# Altium PCB BackUp_XT60_direkt_FotoKiteAdapter2.PcbDoc
Units mm, origin at the board's own origin, x right, y up, seen from the top; angles counter-clockwise.
Board outline 65.07 x 51.43 mm, 2 copper layers (Top Layer, Bottom Layer); 105 components, 57 nets, 295 pads, 32 vias.
Unrouted connection lines stored in the file: 201.
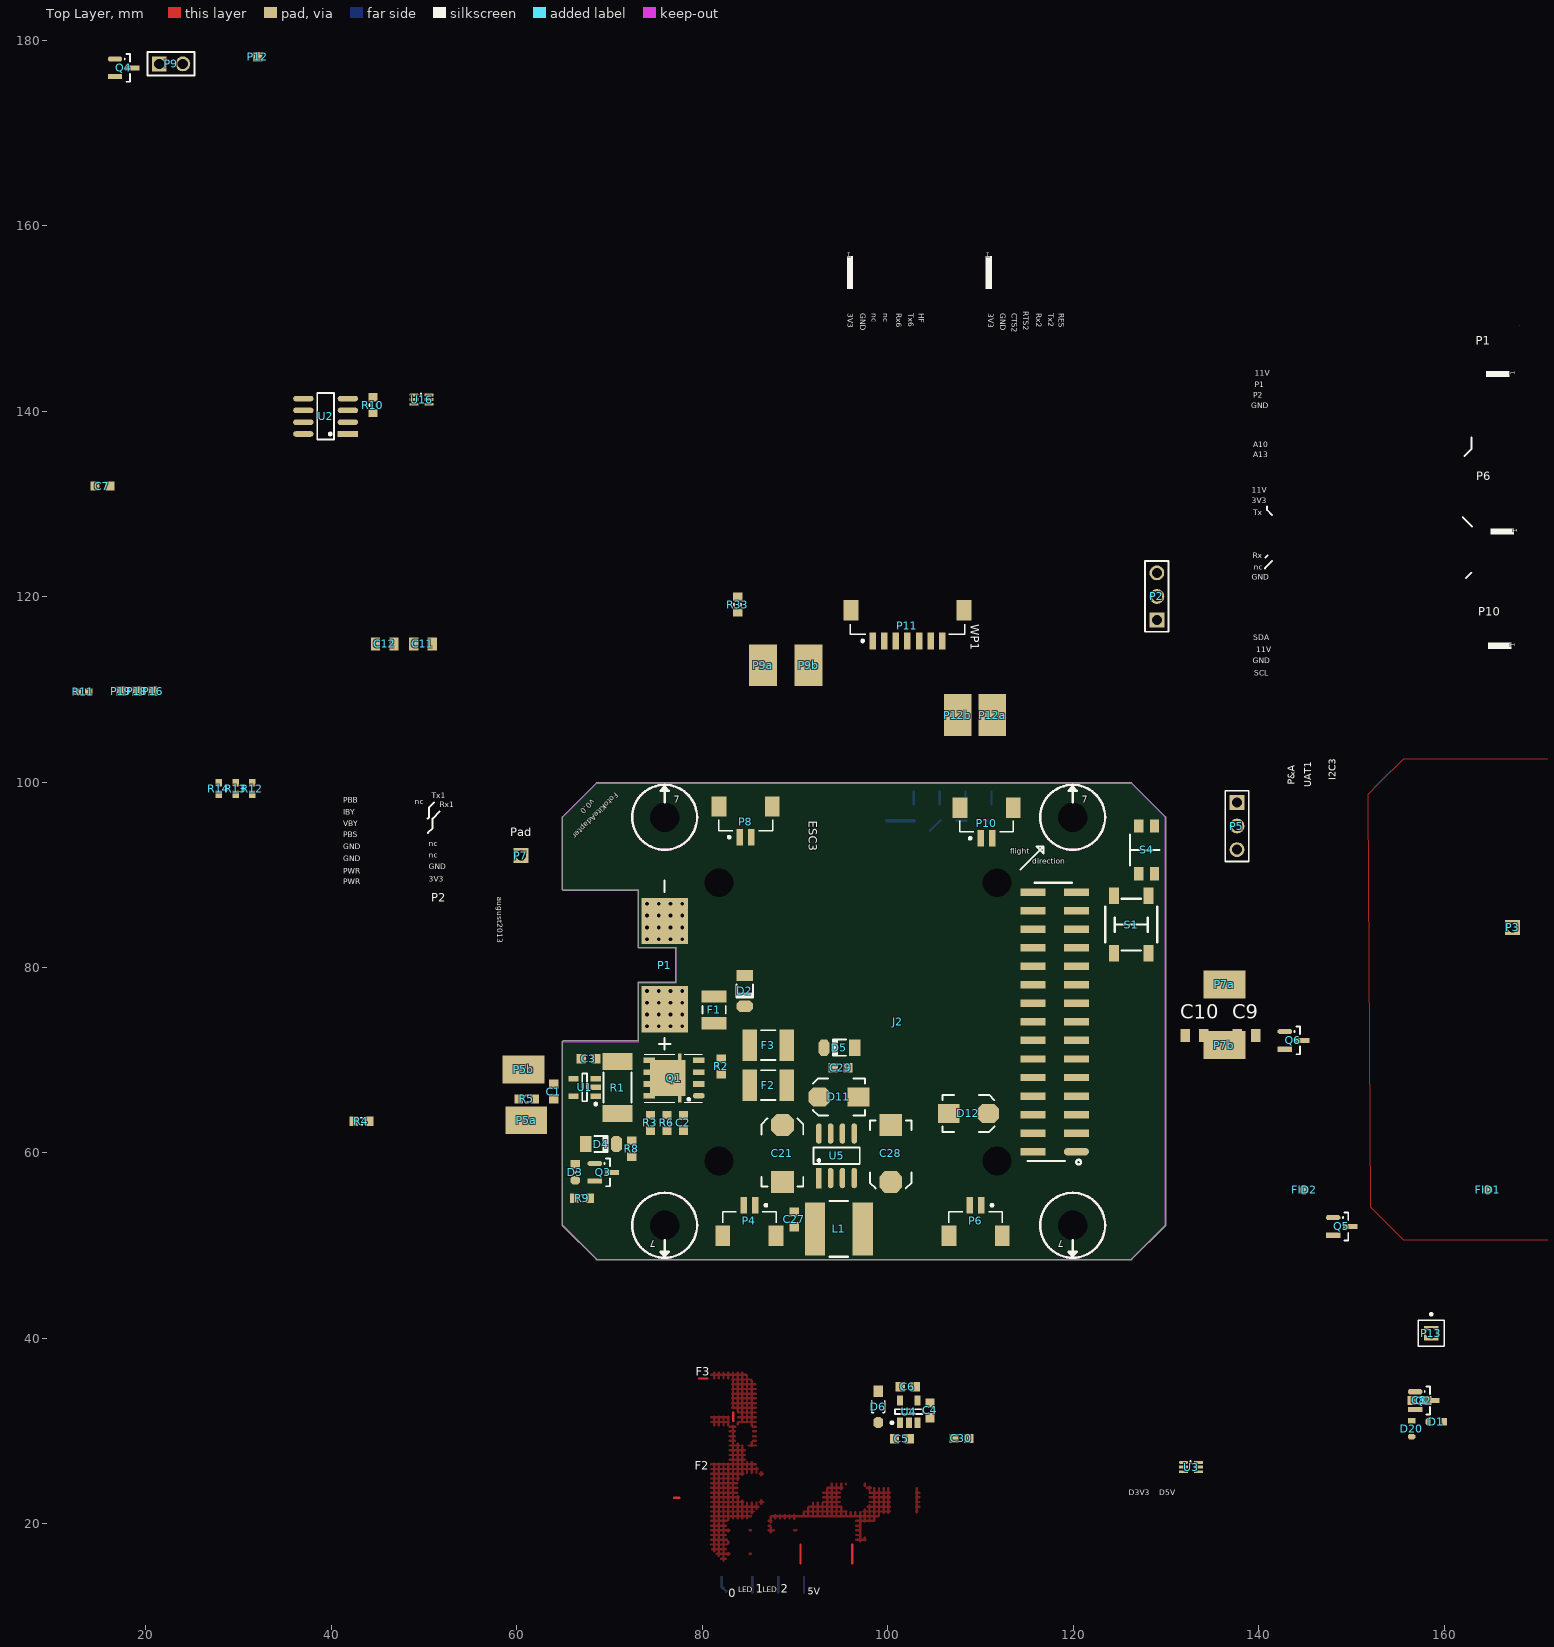
[diagram p0: Top Layer view]
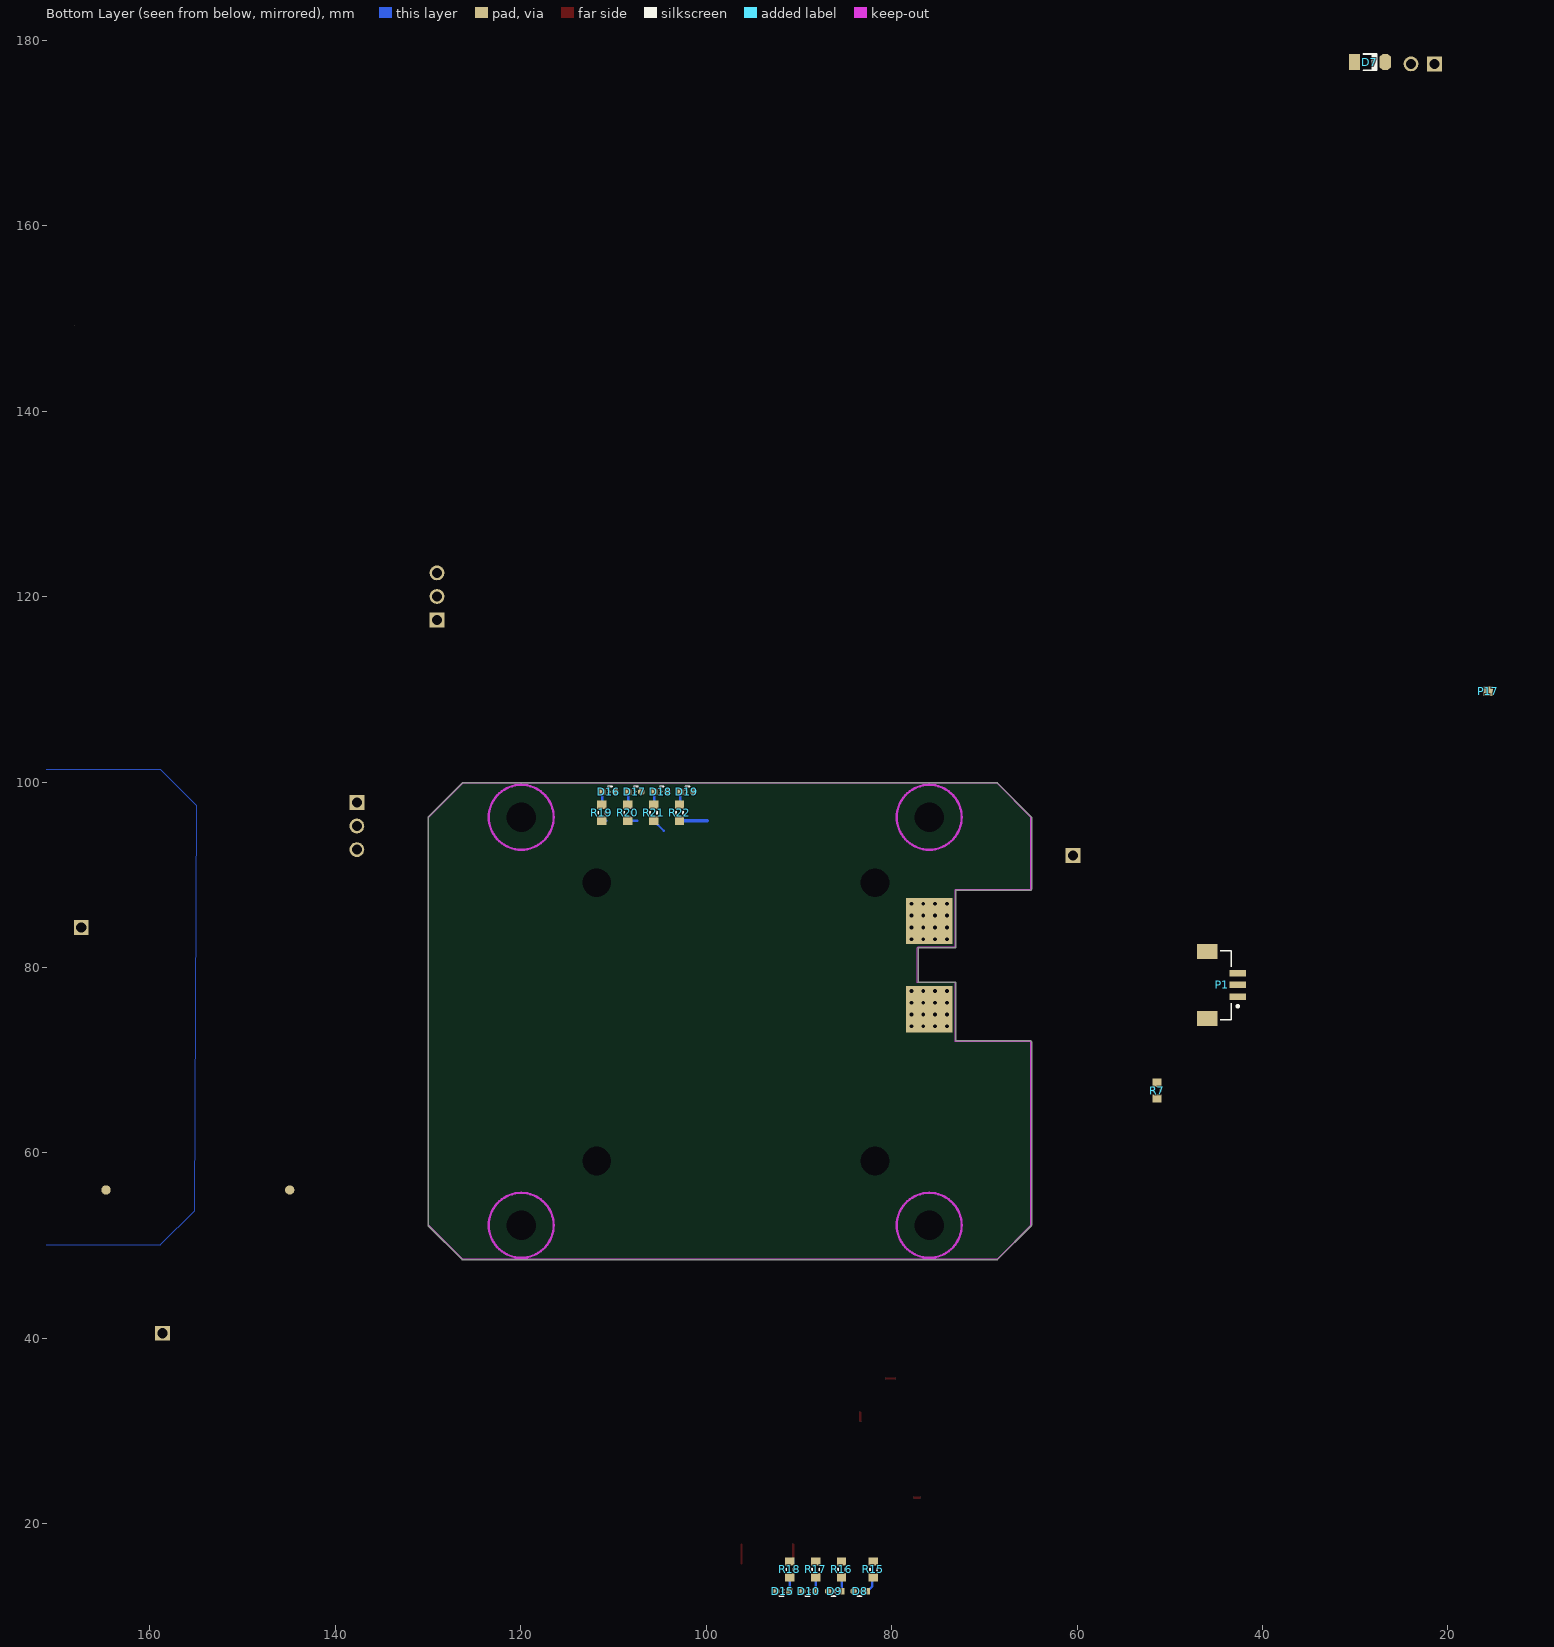
[diagram p1: Bottom Layer view, seen from below]

## Layer stack, top to bottom
Top Layer: signal copper 0.0356
Dielectric: core 0.32, FR-4, Dk 4.8
Bottom Layer: signal copper 0.0356

## Board outline
64.931,52.152 64.932,52.152 68.583,48.5 ccw(c68.629,48.545) 68.584,48.5 68.583,48.5 ccw(c68.629,48.545) 68.629,48.481 126.263,48.481 ccw(c126.263,48.545) 126.309,48.5 129.961,52.152 ccw(c129.915,52.197) 129.979,52.197 129.979,96.197 ccw(c129.915,96.197) 129.959,96.244 129.96,96.242 126.309,99.894 ccw(c126.263,99.849) 126.263,99.913 68.629,99.913 ccw(c68.629,99.849) 68.583,99.894 64.932,96.242 ccw(c64.977,96.197) 64.913,96.197 64.913,88.439 ccw(c64.977,88.439) 64.962,88.377 ccw(c65.024,88.392) 65.024,88.328 73.088,88.328 73.088,82.194 ccw(c73.152,82.194) 73.152,82.131 77.152,82.131 77.152,78.423 73.152,78.423 ccw(c73.152,78.359) 73.088,78.359 73.088,72.073 65.002,72.073 ccw(c65.002,72.009) 64.946,72.04 ccw(c64.977,71.984) 64.913,71.984 64.913,52.197 ccw(c64.977,52.197) 64.932,52.152 64.931,52.152 ccw(c64.977,52.197)

## Design rules (kind name [scope] priority, off if disabled: settings)
Clearance "fine pitch clearance" [HasFootprint('SSOP16') OR   HasFootprint('DF17(3.0)-20DS-0.5V(57)-RECEPTABLE') OR HasFootprint('SOT-666-N') OR HasFootprint('LQFP100 50P1600X1600X160-N') OR HasFootprint('SSOP-SS20_N')  OR HasFootprint('TSSOP10_L') and not InNetClass('POWER')] p1: gap=0.127
Clearance "std clearance" [All] p2: gap=0.254 // normal signals
FabricationTestPointUsage TestPointUsage [All] p1: valid=0 allowmultiple=FALSE
FabricationTestpoint Testpoint [All] p1: side=3 testpointundercomponent=TRUE minsize=1.016 maxsize=2.54 preferedsize=1.524 minholesize=0 maxholesize=1.016 preferedholesize=0.813 testpointgrid=0.025 allowsidetop=TRUE allowsidebottom=TRUE usegrid=TRUE gridtolerance=0
HoleSize [All] p1: absolutevalues=TRUE maxlimit=10 minlimit=0.3 maxpercent=80.000 minpercent=20.000
MinimumSolderMaskSliver [All] p1: minsoldermaskwidth=0.046
PolygonConnect PolygonConnect_1 [InNetClass('POWER')AND isvia] p1: connectstyle=Direct reliefconductorwidth=0.254 reliefentries=4 polygonreliefangle="90 Angle" airgapwidth=0.254
PolygonConnect PolygonConnect_3 [InNetClass('POWER')and InPadClass('POWER')] p2: connectstyle=Direct reliefconductorwidth=0.508 reliefentries=4 polygonreliefangle="90 Angle" airgapwidth=0.254
PolygonConnect PolygonConnect_2 [InNetClass('POWER') and PadXSize_AllLayers > 15] p3: connectstyle=Relief reliefconductorwidth=0.508 reliefentries=4 polygonreliefangle="90 Angle" airgapwidth=0.254
PolygonConnect [All] p4: connectstyle=Relief reliefconductorwidth=0.254 reliefentries=4 polygonreliefangle="90 Angle" airgapwidth=0.254
RoomDefinition uC [InComponentClass('uC')] p1: confinementstyle=ConfineIn formatcopy=TRUE lockcomponents=FALSE outline 0,0 50.8,0 50.8,25.4 0,25.4
RoomDefinition Power [InComponentClass('Power')] p2: confinementstyle=ConfineIn formatcopy=TRUE lockcomponents=FALSE outline 155.571,32.678 160.905,32.678 160.905,39.79 155.571,39.79
RoomDefinition Connector [InComponentClass('Connector')] p3: confinementstyle=ConfineIn formatcopy=TRUE lockcomponents=FALSE outline 155.571,26.074 165.223,26.074 165.223,31.154 155.571,31.154
RoutingTopology "power supply" [InNetClass('Power')] p1: topology=Starburst
RoutingTopology "std signal lines" [All] p2: topology=Shortest
RoutingVias [All] p1: holewidth=0.4 width=0.8 viastyle="Through Hole" minholewidth=0.4 minwidth=0.8 maxholewidth=0.4 maxwidth=0.8
SMDNeckDown finepitch [hasFootprint('TSSOP10_L')] p1: percent=120.000
SMDNeckDown [All] p2: percent=100.000
SilkToSilkClearance SilkToSilkClearance_1 [HasFootprint('3 axis racceleration')] p1: silktosilkclearance=0
SilkToSilkClearance [All] p2: silktosilkclearance=0.127
SilkToSolderMaskClearance SilkscreenOverComponentPads [IsPad] p1: minsilkscreentomaskgap=0.127 clearancetoexposedcopper=TRUE
SolderMaskExpansion [All] p1: expansion=0.102
Width "Schematic Width Constraint" [InNet('SWBATT')] p1: maxlimit=5.08 minlimit=0.254 preferedwidth=0.635 minimp=50.000000 maximp=50.000000 favimp=50.000000
Width "pwr lines" [InNetClass('Power')] p2: maxlimit=2.54 minlimit=0.203 preferedwidth=0.381
Width "signal lines Width" [All] p3: maxlimit=0.635 minlimit=0.203 preferedwidth=0.254 // std lines for low current signals
21 further rules are at their usual default settings.

## Classes and differential pairs
polygon class "New Class": gnd
component class Connector: C7 C11 C12 FID1 FID2 P4 P5a P5b P6 P7a P7b P8 P9a P9b P10 P11 P12a P12b P16 P17 P18 P19 Q5 Q6 R10 R11 R12 R13 R14 U2 U3 U16
component class Power: C1 C2 C3 C4 C5 C6 C21 C27 C28 C29 C30 D1 D2 D3 D4 D5 D6 D11 D20 F1 F2 F3 L1 P13 Q1 Q2 Q3 R1 R2 R3 R4 R5 R6 R7 R8 R9 S1 U1 U4 U5
net class Power: BAT D5V D11V2 DGND NetC27_1 NetD12_2 SWBATT V_BATT_SUPPLY V_SUPPLY
component class uC: C8 D7 D8 D9 D10 D12 D15 D16 D17 D18 D19 J2 P2 P3 P5 P7 P9 P12 Q4 R15 R16 R17 R18 R19 R20 R21 R22 R33 S4
pad class POWER: C21-1 C21-2 C28-1 C29-2 C30-2 D5-2 D12-1 F1-1 F1-2 F2-1 F2-2 L1-2 P2-1 P2-2 U5-4 U5-7

## Components (designator, comment, footprint, x,y, rotation, side; value= is the part's Value field where it differs from the comment)
C1 "100nF" "CAP_0603i_1608m -N" 63.984,66.624 r270 top
C2 "100nF" "CAP_0603i_1608m -N" 77.978,63.246 r90 top
C3 "100nF" "CAP_0603i_1608m -N" 67.742,70.157 r0 top
C4 "10nF" "CAP_0603i_1608m -N" 104.572,32.233 r90 top
C5 "2u2F" "CAP_0603i_1608m -N" 101.524,29.185 r180 top
C6 "2u2F" "CAP_0603i_1608m -N" 102.159,34.773 r180 top
C7 "100nF / 6V" "CAP_0603i_1608m -N" 15.316,131.922 r0 top
C8 "100nF" "CAP_0603i_1608m -N" 157.349,33.313 r0 top
C9 "10uF" "CAP_0805i_2012m -N" 138.684,72.644 r0 top
C10 "10uF" "CAP_0805i_2012m -N" 133.096,72.644 r0 top
C11 "10uF" "CAP_0805i_2012m -N" 49.878,114.897 r0 top
C12 "10uF" "CAP_0805i_2012m -N" 45.77,114.897 r0 top
C21 "100uF" "EIA-7343-31 case D -N" 88.646,59.944 r270 top
C27 "10nF" "CAP_0603i_1608m -N" 89.916,52.832 r90 top
C28 "100uF" "EIA-7343-31 case D -N" 100.33,59.944 r90 top
C29 "100nF" "CAP_0603i_1608m -N" 94.92,69.19 r180 top
C30 "100nF" "CAP_0603i_1608m -N" 107.95,29.21 r180 top
D1 "CDSU4148" SOD523F 159.15,31.012 r0 top
D2 "SMA6J20A" "Mini MELF - SOD-80 -N" 84.582,77.47 r90 top
D3 "Power" LED_0603i_1608m-n 66.294,57.912 r90 top
D4 "5V6" "Mini MELF - SOD-80 -N" 69.088,60.96 r180 top
D5 "SMA6J20A" "Mini MELF - SOD-80 -N" 94.793,71.349 r0 top
D6 "MBR0540T1G" SOD123 98.984,32.614 r90 top
D7 "Diode" "Mini MELF - SOD-80 -N" 28.417,177.641 r0 bottom
D8 "Diode LED green" LED_LTST_SIDE 83.363,12.74 r180 bottom (schematic designator D1)
D9 "Diode LED red" LED_LTST_SIDE 86.157,12.74 r180 bottom (schematic designator D2)
D10 "Diode LED yellow" LED_LTST_SIDE 88.951,12.74 r180 bottom (schematic designator D3)
D11 "B230" "Diode SMB DO-214aa -N" 94.742,66.04 r0 top
D12 "B230" "Diode SMB DO-214aa -N" 108.712,64.262 r180 top
D15 "Diode LED green" LED_LTST_SIDE 91.745,12.74 r180 bottom (schematic designator D4)
D16 "Diode LED green" LED_LTST_SIDE 110.49,98.972 r0 bottom (schematic designator D7)
D17 "Diode LED red" LED_LTST_SIDE 107.696,98.972 r0 bottom (schematic designator D8)
D18 "Diode LED yellow" LED_LTST_SIDE 104.902,98.972 r0 bottom (schematic designator D9)
D19 "Diode LED green" LED_LTST_SIDE 102.108,98.972 r0 bottom (schematic designator D10)
D20 "CDSU4148" SOD523F 156.51,30.25 r90 top
F1 "3413.0331.22" "Fuse_1210i_3225m -N" 81.28,75.438 r270 top (schematic designator F7)
F2 "1812L150/24MR" "Fuse_1812i_4532m -N" 87.122,67.31 r0 top (schematic designator F1)
F3 "1812L150/24MR" "Fuse_1812i_4532m -N" 87.122,71.628 r0 top (schematic designator F2)
FID1 "Fiducial" "Fiducial 2 sides" 164.719,56.007 r90 top
FID2 "Fiducial" "Fiducial 2 sides" 144.907,56.007 r90 top
J2 "PX4FMU_v1.7_Expansion Con" PX4FMU_v1.7_module_sicket 122.301,56.134 r180 top locked
L1 "ASPI-6045S-470M-T" ABRACON_ASPI-6045S 94.742,51.816 r0 top
P1 "XT60" XT60 75.946,80.264 r90 top
P1 "DF13-3Pin" Hirose_DF13_SMT_RA_N3 45.974,78.74 r90 bottom
P2 "Header 3" HDR1X3 129.032,117.475 r90 top
P3 "Pad" "PIN1 style 2" 167.386,84.328 r270 top
P4 "ESC1" Hirose_DF13_SMT_RA_N2 85.09,51.054 r180 top
P5 "Header 3" HDR1X3 137.668,97.79 r270 top
P5a "Motor 1+" Pad_3x4.5mm 61.011,63.525 r90 top
P5b "Motor 1-" Pad_3x4.5mm 60.731,69.012 r90 top
P6 "ESC2" Hirose_DF13_SMT_RA_N2 109.474,51.054 r180 top
P7 "Pad" "PIN1 style 2" 60.452,92.075 r90 top
P7a "Motor 2+" Pad_3x4.5mm 136.322,78.181 r90 top
P7b "Motor 2-" Pad_3x4.5mm 136.322,71.628 r90 top
P8 "ESC3" Hirose_DF13_SMT_RA_N2 84.684,97.358 r0 top
P9 "Buzzer" HDR1X2 21.449,177.446 r0 top
P9a "Motor 3+" Pad_3x4.5mm 86.538,112.598 r0 top
P9b "Motor 3-" Pad_3x4.5mm 91.465,112.598 r0 top
P10 "ESC4" Hirose_DF13_SMT_RA_N2 110.668,97.231 r0 top
P11 "WP1" Hirose_DF13_SMT_RA_N7 102.133,118.516 r0 top
P12 "Pad" Pad_0603 32.077,178.214 r90 top
P12a "Motor 4+" Pad_3x4.5mm 111.27,107.224 r0 top
P12b "Motor 4-" Pad_3x4.5mm 107.559,107.224 r0 top
P13 "GND" PIN1 158.619,40.552 r0 top
P16 "I2C GND" Pad_0603 20.781,109.784 r90 top
P17 "I2C GND" Pad_0603 15.648,109.784 r270 bottom
P18 "I2C GND" Pad_0603 19.07,109.784 r90 top
P19 "I2C GND" Pad_0603 17.359,109.784 r90 top
Q1 "SI7635DP-T1-GE3" "PowerPak SO-8" 76.962,68.072 r180 top
Q2 "BSS138" SOT23-N 157.8,33.299 r0 top
Q3 "BC817-40" SOT23-N 69.342,57.912 r0 top
Q4 "BSS138" SOT23-N 17.596,177.016 r0 top
Q5 "BSN20" SOT23-N 148.971,52.07 r0 top
Q6 "BSN20" SOT23-N 143.764,72.136 r0 top
R1 "1m" "RES_2512i_6332m -N" 70.866,67.056 r270 top
R2 "100k" "RES_0603i_1608m -N" 82.042,69.342 r270 top
R3 "360k" "RES_0603i_1608m -N" 74.422,63.246 r270 top
R4 "100" "RES_0603i_1608m -N" 43.256,63.418 r0 top
R5 "100k" "RES_0603i_1608m -N" 61.076,65.824 r180 top
R6 "100k" "RES_0603i_1608m -N" 76.2,63.246 r90 top
R7 "10k" "RES_0603i_1608m -N" 51.372,66.726 r270 bottom
R8 "10k" "RES_0603i_1608m -N" 72.39,60.452 r270 top
R9 "2k2" "RES_0603i_1608m -N" 67.056,55.118 r180 top
R10 "120" "RES_0603i_1608m -N" 44.495,140.64 r90 top
R11 "Res" "RES_0402i_1005m -N" 13.238,109.736 r0 top
R12 "Res" "RES_0402i_1005m -N" 31.479,99.3 r90 top
R13 "Res" "RES_0402i_1005m -N" 29.671,99.3 r90 top
R14 "Res" "RES_0402i_1005m -N" 27.863,99.3 r90 top
R15 "2k7" "RES_0603i_1608m -N" 81.966,15.088 r90 bottom (schematic designator R2)
R16 "1k2" "RES_0603i_1608m -N" 85.395,15.088 r90 bottom (schematic designator R3)
R17 "680R" "RES_0603i_1608m -N" 88.189,15.088 r90 bottom (schematic designator R4)
R18 "1k" "RES_0603i_1608m -N" 90.983,15.088 r90 bottom (schematic designator R5)
R19 "2k7" "RES_0603i_1608m -N" 111.252,96.686 r270 bottom (schematic designator R6)
R20 "1k2" "RES_0603i_1608m -N" 108.458,96.686 r270 bottom (schematic designator R7)
R21 "680R" "RES_0603i_1608m -N" 105.664,96.686 r270 bottom (schematic designator R8)
R22 "1k" "RES_0603i_1608m -N" 102.87,96.686 r270 bottom (schematic designator R9)
R33 "10k" "RES_0603i_1608m -N" 83.82,119.126 r90 top
S1 "SW PB" SW-KPT-1187B 126.263,84.633 r90 top
S4 "EVQ-PUB02K" EVQPU 127.914,92.685 r90 top
U1 "MAX4372FEUK+T" MAXM-U5+1_N 67.317,67.074 r180 top
U2 "CAN Transceiver" SOIC127P600-8N 39.387,139.44 r180 top (schematic designator U?)
U3 "PESD3V3L5UV" SOT-666-N 132.72,26.127 r0 top
U4 "LP2985IM5X-3.3" MF05A_N 102.286,32.106 r90 top
U5 "LM2675MX-5.0/NOPB" SOIC127P600-8N 94.488,59.69 r90 top
U16 "PESD3V3L5UV" SOT-666-N 49.727,141.25 r0 top

## Footprints (in the part's own frame and the unit in brackets; to place one, negate y for a bottom-side part, rotate by r counter-clockwise, add the part's x,y. Pads: shape width x height; smd on the part's side, far side on the other; paste and mask are expansions set on the pad)
ABRACON_ASPI-6045S [mm]
  rect 2.2x5.7 smd: 1(-2.58,0) 2(2.58,0)
  silkscreen extent -1,-3.05 1,3, body extent -2.96,-3.05 3,3, height 4.5
"CAP_0603i_1608m -N" [mm] "Chip Capacitor, Body 1.6x0.8mm, IPC Medium Density"
  rect 1x1 smd: 1(-0.8,0) 2(0.8,0)
  body extent -0.8,-0.4 0.8,0.4, height 0.8
"CAP_0805i_2012m -N" [mm] "Chip Capacitor, Body 2.0x1.3mm, IPC Medium Density"
  rect 1x1.4 smd: 1(-1,0) 2(1,0)
  body extent -1,-0.62 1,0.63, height 0.6
"Diode SMB DO-214aa -N" [mm] "Diode Case  4.4x3.5mm, IPC Medium Density"
  rect 2.35x2.05 smd: 1(2.125,0)
  oct 2.35x2.05 smd: 2(-2.125,0)
  silkscreen extent -2.8,-2 2.8,2, body extent -2.7,-1.8 2.7,1.8, height 2.5
"EIA-7343-31 case D -N" [mm] "Molded Diode, 2-Leads, Body 7.3x4.3mm, IPC Medium Density"
  oct 2.35x2.45 smd: 1(-3.075,0)
  rect 2.35x2.45 smd: 2(3.075,0)
  silkscreen extent -3.77,-2.25 3.56,2.25, body extent -4.5,-2.32 4.5,2.29
EVQPU [mm] "Panasonic SMT Tact Switch"
  rect 1.45x1 smd: 1(-2.575,0.85) 1(2.575,0.85) 2(-2.575,-0.85) 2(2.575,-0.85)
  silkscreen extent -1.65,-1.4 1.65,1.78, body extent -2.35,-2.66 2.35,1.71, height 1.65
"Fiducial 2 sides" [mm] "Fiducial marks"
  round 1 smd mask+0.5: 0(0,0)
  round 1 smd far side mask+0.5: 0(0,0)
"Fuse_1210i_3225m -N" [mm] "Chip Fuse Body 3.2x2.5mm, IPC Medium Density"
  rect 1.3x2.7 smd: 1(-1.45,0) 2(1.45,0)
  silkscreen extent -0.4,-1.25 0.4,1.25, body extent -1.61,-1.29 1.61,1.29, height 0.67
"Fuse_1812i_4532m -N" [mm] "Chip Fuse Body 4.5x3.2mm, IPC Medium Density"
  rect 1.6x3.4 smd: 1(-2,0) 2(2,0)
  silkscreen extent -0.8,-1.6 0.8,1.6, body extent -2.36,-1.7 2.37,1.71, height 1.34
HDR1X2 [mm] "Connector; Header; 2 Position"
  rect 1.6x1.6 hole 1.1: 1(0,0)
  round 1.6 hole 1.1: 2(2.54,0)
  silkscreen extent -1.27,-1.27 3.81,1.27, body extent -1.27,-1.27 3.81,1.27, height 10.3
HDR1X3 [mm] "Connector; Header; 3 Position"
  rect 1.6x1.6 hole 1.1: 1(0,0)
  round 1.6 hole 1.1: 2(2.54,0) 3(5.08,0)
  silkscreen extent -1.27,-1.27 6.35,1.27, body extent -1.27,-1.27 6.35,1.27, height 1
Hirose_DF13_SMT_RA_N2 [mm] "Hirose DF13-series SMT right-angle connector, 2 pin"
  rect 0.7x1.8 smd: 1(-0.625,-3.3) 2(0.625,-3.3)
  rect 1.6x2.2 smd: ""(-2.875,0) ""(2.875,0)
  silkscreen extent -2.9,-3.43 2.9,-1.4, body extent -2.08,-2.4 2.07,2.5, height 3.6
Hirose_DF13_SMT_RA_N3 [mm] "Hirose DF13-series SMT right-angle connector, 3 pin"
  rect 0.7x1.8 smd: 1(-1.875,-3.3) 2(-0.625,-3.3) 3(0.625,-3.3)
  rect 1.6x2.2 smd: ""(-4.225,0) ""(2.975,0)
  silkscreen extent -4.4,-3.43 3.05,-1.4, body extent -4.38,-2.6 3,2.3, height 3.6
Hirose_DF13_SMT_RA_N7 [mm] "Hirose DF13-series SMT right-angle connector, 7 pin"
  rect 0.7x1.8 smd: 1(-3.75,-3.3) 2(-2.5,-3.3) 3(-1.25,-3.3) 4(0,-3.3) 5(1.25,-3.3) 6(2.5,-3.3) 7(3.75,-3.3)
  rect 1.6x2.2 smd: ""(-6.1,0) ""(6.1,0)
  silkscreen extent -6.17,-3.43 6.18,-1.5, body extent -6.66,-3.91 6.74,2.59, height 3.58
LED_0603i_1608m-n [mm] "Chip LED, 2-Leads, Body 1.6x0.8mm, IPC Medium Density"
  rect 0.9x1 smd: 1(0.85,0)
  oct 0.9x1 smd: 2(-0.85,0)
  silkscreen extent -0.08,-0.18 0.1,0.18, body extent -0.83,-0.34 0.83,0.38, height 0.68
LED_LTST_SIDE [mm]
  rect 0.7x0.7 smd: 1(0.7,0)
  oct 0.7x0.7 smd: 2(-0.7,0)
  silkscreen extent -0.33,-0.53 0.1,0.18, body extent -0.74,-0.81 0.85,0.34, height 0.6
MAXM-U5+1_N [mm] "SOT23, 5-Leads, Body 2.9x1.625mm, Pitch 0.95mm, IPC Medium Density"
  rect 1.1x0.6 smd: 1(-1.2,0.95) 2(-1.2,0) 3(-1.2,-0.95) 4(1.2,-0.95) 5(1.2,0.95)
  silkscreen extent -1.33,-1.5 0.25,1.92, body extent -0.87,-1.5 0.87,1.5, height 1.45
MF05A_N [mm] "SOT23, 5-Leads, Body 2.9x1.6mm, Pitch 0.95mm, Lead Span 2.8mm, IPC Medium Density"
  rect 1.1x0.65 smd: 1(-1.2,0.95) 2(-1.2,0) 3(-1.2,-0.95) 4(1.2,-0.95) 5(1.2,0.95)
  silkscreen extent -1.32,-1.5 0.25,1.95, body extent -0.83,-1.49 0.83,1.5, height 1.19
"Mini MELF - SOD-80 -N" [mm] "MELF Diode, 2-Leads, Body 3.5x1.5mm, IPC Medium Density"
  rect 1.2x1.75 smd: 1(1.65,0)
  oct 1.2x1.75 smd: 2(-1.65,0)
  silkscreen extent -0.7,-0.88 0.7,0.87, body extent -1.75,-0.75 1.75,0.75, height 1.55
Pad_3x4.5mm [mm]
  rect 3x4.5 smd: 1(0,0)
Pad_0603 [mm]
  rect 1x1 smd: 1(0,0)
PIN1 [mm] "Connector; Plug"
  rect 1.6x1.6 hole 1.1: 1(0,0)
  silkscreen extent -1.4,-1.4 1.4,2.17
"PIN1 style 2" [mm] "Connector; Plug"
  rect 1.6x1.6 hole 1.1: 1(0,0)
"PowerPak SO-8" [mm] "for    SI7635DP-T1-GE3"
  rect 0.4x5.3 smd: 0(-0.61,0)
  rect 3.81x3.91 smd: 0(0.69,0)
  oval 1.27x0.6 smd: 1(-2.67,1.905)
  rect 1.27x0.6 smd: 2(-2.67,0.635) 3(-2.67,-0.635) 4(-2.67,-1.905) 5(2.67,-1.905) 6(2.67,-0.635) 7(2.67,0.635) 8(2.67,1.905)
  silkscreen extent -3.02,-2.59 3.23,2.59, body extent -3.02,-2.6 3.22,2.65, height 1.19
PX4FMU_v1.7_module_sicket [mm] "socket to plug the PX4FMU into"
  round 1.524 hole 3.1: 0(10.5,-3) 0(10.5,-33) 0(40.5,-3) 0(40.5,-33)
  oval 2.7x0.8 smd: 1(1.95,-4)
  rect 2.7x0.8 smd: 2(6.65,-4) 3(1.95,-6) 4(6.65,-6) 5(1.95,-8) 6(6.65,-8) 7(1.95,-10) 8(6.65,-10) 9(1.95,-12) 10(6.65,-12) 11(1.95,-14) 12(6.65,-14) 13(1.95,-16) 14(6.65,-16) 15(1.95,-18) 16(6.65,-18) 17(1.95,-20) 18(6.65,-20) 19(1.95,-22) 20(6.65,-22) 21(1.95,-24) 22(6.65,-24) 23(1.95,-26) 24(6.65,-26) 25(1.95,-28) 26(6.65,-28) 27(1.95,-30) 28(6.65,-30) 29(1.95,-32) 30(6.65,-32)
  silkscreen extent 1.45,-33 7.2,-2.62, body extent 1.3,-33.01 7.3,-3.01, height 6.6
"RES_0402i_1005m -N" [mm] "Chip Resistor, Body 1.1x0.5mm, IPC Medium Density"
  rect 0.8x0.7 smd: 1(-0.6,0) 2(0.6,0)
  body extent -0.5,-0.25 0.5,0.25, height 0.3
"RES_0603i_1608m -N" [mm] "Chip Resistor, Body 1.6x0.8mm, IPC Medium Density"
  rect 0.9x1 smd: 1(-0.85,0) 2(0.85,0)
  silkscreen extent -0.13,-0.38 0.13,0.38, body extent -0.8,-0.4 0.8,0.4, height 0.4
"RES_2512i_6332m -N" [mm] "Chip Resistor, Body 6.3x3.2mm, IPC Medium Density"
  rect 1.8x3.2 smd: 1(-2.8,0) 2(2.8,0)
  silkscreen extent -1.6,-1.5 1.6,1.5, body extent -3.3,-1.4 3.3,1.27, height 0.71
SOD123 [mm] "SOD123  2-Leads, Body, IPC Medium Density"
  rect 1.22x1 smd: 1(1.681,0)
  oct 1.22x1 smd: 2(-1.681,0)
  silkscreen extent -0.64,-0.7 0.64,0.7, body extent -1.85,-0.84 1.85,0.76, height 1.27
SOD523F [mm] "SOD523F  2-Leads, Body, IPC Medium Density"
  rect 0.6x0.8 smd: 1(0.85,0)
  oct 0.6x0.8 smd: 2(-0.85,0)
  body extent -0.9,-0.51 0.9,0.49, height 0.85
SOIC127P600-8N [mm] "SOIC, 8-Leads, Body 4.9x3.9mm, Pitch 1.27mm, IPC Medium Density"
  rect 2.2x0.6 smd: 1(-2.4,1.905)
  oval 2.2x0.6 smd: 2(-2.4,0.635) 3(-2.4,-0.635) 4(-2.4,-1.905) 5(2.4,-1.905) 6(2.4,-0.635) 7(2.4,0.635) 8(2.4,1.905)
  silkscreen extent -0.9,-2.5 0.9,2.5, body extent -3.01,-2.5 3.01,2.5, height 1.75
SOT23-N [mm] "SOT23, 3-Leads, Body 3.0x2.6mm (max), Pitch 0.95mm, IPC Medium Density"
  oct 1.55x0.55 smd: 1(-0.925,0.95)
  rect 1.55x0.55 smd: 2(-0.925,-0.95) 3(0.925,0)
  silkscreen extent 0.13,-1.5 0.7,1.5, body extent -1.21,-1.45 1.21,1.45, height 0.98
SOT-666-N [mm] "SOT666, 6-Leads, Body 1.5x2.6mm (max), Pitch 0.50mm, IPC Medium Density"
  oct 0.99x0.3 smd: 1(-0.805,0.5)
  rect 0.99x0.3 smd: 2(-0.805,0) 3(-0.805,-0.5) 4(0.805,-0.5) 5(0.805,0) 6(0.805,0.5)
  silkscreen extent -0.05,0.38 -0.05,0.64, body extent -0.88,-0.85 0.82,0.85, height 0.6
SW-KPT-1187B [mm] "SMT Tact Switch"
  rect 1.8x1.1 smd: 1(-3.1,1.85) 1(3.1,1.85) 2(-3.1,-1.85) 2(3.1,-1.85)
  silkscreen extent -2.79,-2.79 2.79,2.79, body extent -2.6,-2.6 2.6,2.6, height 1.6
XT60 [mm] "High Power Connector"
  rect 5x5 smd: 1(-4.75,0) 2(4.75,0)
  rect 5x5 smd far side: 1(-4.75,0) 2(4.75,0)
  silkscreen extent -9.14,-0.64 9.14,0.63, body extent -7.82,-0.51 8.08,20.69, height 4.08

## Part data
C1 C2 C3 C4 C5 C6 C7 C8 C9 C10 C11 C12 C27 C29 C30: library part Cap, "capacitor"
C21 C28: library part "Cap pol", "Polarised capacitor (e.g. Electrolytic )"
D1 D20: library part Diode, "Default Diode"
D2 D4 D5: library part "Diode Zener", "Zener Diode"
D3 D8 D9 D10 D15 D16 D17 D18 D19: library part "Diode LED", "LED"
D6 D11 D12: library part "Diode  Schottky", "Schottky Diode"
D7: "Default Diode"
F1 F2 F3: library part Fuse, "Fuse"
FID1 FID2: "Fiducial mark for automatic pcb population"
J2: library part "PX4FMU_v1.7_Expansion Con_1", "J2 / J3"
L1: library part Inductor, "Inductor"
P1: "Header, 2-Pin, Power plug"
P1: "Hirose_DF13_SMT_RA_N4"
P2 P5: "Header, 3-Pin"
P3 P7 P12: "Single Pad or Testpoint"
P4 P6 P8 P10: library part DF13-2Pin, "Hirose_DF13_SMT_RA_N2"
P5a P5b P7a P7b P9a P9b P12a P12b P13 P16 P17 P18 P19: library part Pad, "Single Pad or Testpoint"
P9: library part "Header 2", "Header, 2-Pin"
P11: library part DF13-7Pin, "Hirose_DF13_SMT_RA_N8"
Q1: library part MOSFET-P-Power_2, "Power P-Channel MOSFET + pad"
Q2 Q4: library part MOSFET-N2, "N-Channel MOSFET"
Q3: library part "BJT NPN", "NPN Bipolar Transistor"
Q5 Q6: library part MOSFET-N, "N-Channel MOSFET"
R1 R2 R3 R4 R5 R6 R7 R8 R9 R10 R15 R16 R17 R18 R19 R20 R21 R22 R33: library part Res, "Resistor"
R11 R12 R13 R14: "Resistor"
S1: "Switch"
S4: library part "SW PB", "Switch"
U1: library part CMP-0252-00304-1, "Micropower, Voltage-Output, High-Side, Current-Sense Amplifier, 50 V / V Gain, -40 to 85 degC, 5-Pin SOT23 (U5+1), Pb-Free, Tape and Reel"
U2: library part "SN65 HVD 1050DR", "SN65 HVD 1050DR"
U3 U16: library part PESDx, "ESD-protection diode array, 5ch"
U4: library part CMP-0062-01952-2, "Micropower 150 mA Low-Noise Ultra Low-Dropout Regulator, 5-pin SOT-23"
U5: library part LM2675, "IC REG SIMPLE SWITCHER 8-SOIC"

## Free pads (board coordinates)
  rect 0.3x0.8 hole 3.2: 4(75.946,96.197) 5(119.946,96.197) 6(119.946,52.197) 7(75.946,52.197)

## Via types
v1: diameter 0.813, hole 0.406, Top Layer to Bottom Layer, tented both sides, 32 vias

## Nets (pads, with @x,y where several pads share a name; then routed paths per layer and width w, separated by ;. In a path a pad name is that pad's centre, name@x,y a point inside that pad or via, vN(x,y) a via of type N, cw(c..) or ccw(c..) an arc to the next point about the centre after c; other vN are vias at no path point)
5V: C7.1 U2.3
ADC_IN10: J2.11 P3.1
BAT: F1.1 P1.1@75.946,75.514
CAN_RX: J2.6 U2.4
CAN_TX: J2.5 U2.1
CANH: R10.2 U2.7 U3.6
CANL: R10.1 U2.6 U3.4
D3V3: C6.2 D6.1 P11.1 Q5.1 Q6.1 R13.2 R14.2 R33.2 U4.5
D5V: C5.2 C28.1 C30.2 D6.2 D7.2 D12.1 L1.2 P9.1 R11.2 R12.2 R18.2 R22.2 U4.1 U4.3 U5.4 | length 3
  Bottom Layer w0.381: 99.897,95.836 R22.2
D11V2: F3.2
DGND: C1.1 C2.1 C3.1 C4.1 C5.1 C6.1 C7.2 C8.1 C9.1 C10.1 C11.1 C12.1 C21.2 C28.2 C29.1 C30.1 D2.1 D4.1 D5.1 D8.2 D9.2 D10.2 D11.1 D15.2 D16.2 D17.2 D18.2 D19.2 J2.3 J2.4 J2.27 P1.2@75.946,85.014 P2.3 P5.3 P5b.1 P7b.1 P9b.1 P11.2 P12b.1 P13.1 P16.1 P17.1 P18.1 P19.1 Q2.2 Q4.2 R6.1 R7.1 R9.2 S1.1 S4.2 U1.1 U2.2 U2.8 U3.2 U4.2 U5.6 U16.2
  other v1: 74.041,73.664 75.311,73.664 76.581,73.664 77.851,73.664 74.041,74.934 75.311,74.934 76.581,74.934 77.851,74.934 74.041,76.204 75.311,76.204 76.581,76.204 77.851,76.204 74.041,77.474 75.311,77.474 76.581,77.474 77.851,77.474 74.041,83.054 75.311,83.054 76.581,83.054 77.851,83.054 74.041,84.324 75.311,84.324 76.581,84.324 77.851,84.324 74.041,85.594 75.311,85.594 76.581,85.594 77.851,85.594 74.041,86.864 75.311,86.864 76.581,86.864 77.851,86.864
GPIO: J2.30 P11.7 U16.4
I2C2_SCL: J2.17 P5.1
I2C2_SDA: J2.18 P5.2
I2C3_SCL: J2.9 Q5.2 R13.1
I2C3_SCL_5V: P4.1 P6.1 P8.1 P10.1 Q5.3 R11.1
I2C3_SDA: J2.10 Q6.2 R14.1
I2C3_SDA_5V: P4.2 P6.2 P8.2 P10.2 Q6.3 R12.1
I_BAT: C1.2 J2.29 R5.2
LED0: J2.16 R15.2 R19.2 | length 0.5
  Bottom Layer w0.254: 110.744,95.836 R19.2
LED1: J2.15 R16.2 R20.2 | length 1
  Bottom Layer w0.254: 107.442,95.836 R20.2
LED2: J2.14 R17.2 R21.2 | length 1.5
  Bottom Layer w0.254: 104.57,94.742 R21.2
NetC4_2: C4.2 U4.4
NetC27_1: C27.1 D11.2 L1.1 U5.8
NetC27_2: C27.2 U5.1
NetD1_1: D1.1 R4.1
NetD1_2: D1.2 D20.2 S1.2
NetD2_2: D2.2 F1.2 Q1.1 Q1.2 Q1.3 R2.2
NetD3_2: D3.2 Q3.3
NetD4_2: D4.2 Q3.1 R8.2
NetD7_1: D7.1 P9.2 Q4.3
NetD8_1: D8.1 R15.1 | length 1.7
  Bottom Layer w0.254: R15.1@82.093,14.238 82.093,13.248 D8.1@82.601,12.74
NetD9_1: D9.1 R16.1 | length 1.6
  Bottom Layer w0.254: D9.1@85.395,12.61 R16.1
NetD10_1: D10.1 R17.1 | length 1.6
  Bottom Layer w0.254: D10.1@88.189,12.61 R17.1
NetD12_2: D12.2 J2.1 J2.2
NetD15_1: D15.1 R18.1 | length 1.6
  Bottom Layer w0.254: D15.1@90.983,12.61 R18.1
NetD16_1: D16.1 R19.1 | length 1.4
  Bottom Layer w0.254: R19.1@111.19,97.598 D16.1
NetD17_1: D17.1 R20.1 | length 1.4
  Bottom Layer w0.254: R20.1@108.396,97.598 D17.1
NetD18_1: D18.1 R21.1 | length 1.4
  Bottom Layer w0.254: R21.1@105.602,97.598 D18.1
NetD19_1: D19.1 R22.1 | length 1.4
  Bottom Layer w0.254: R22.1@102.808,97.598 D19.1
NetJ2_24: J2.24 R4.2
NetJ2_25: J2.25 Q2.1 R7.2
NetJ2_26: J2.26 P12.1 Q4.1
NetQ3_2: Q3.2 R9.1
NetR5_1: R5.1 U1.2
PBC_EN: D20.1 Q1.4 Q2.3 R2.1
PPM_IN: J2.23 P7.1
SW0: C8.2 J2.13 R33.1 S4.1
SWBATT: C3.2 Q1.0 Q1.5 Q1.6 Q1.7 Q1.8 R1.1 R3.2 U1.3 U1.4
U1_RX: J2.8 P2.2
U1_TX: J2.7 P2.1
U2_CTS: J2.19 P11.3 U16.3
U2_RTS: J2.20 P11.4 U16.1
U2_RX: J2.21 P11.5 U16.6
V_BAT: C2.2 J2.28 R3.1 R6.2
V_BATT_SUPPLY: C9.2 C10.2 C11.2 C12.2 D3.1 F2.1 F3.1 P5a.1 P7a.1 P9a.1 P12a.1 R1.2 R8.1 U1.5
V_SUPPLY: C21.1 C29.2 D5.2 F2.2 U5.7
pads on no net: FID1.0 FID2.0 J2.0 J2.12 J2.22 P1. P1.1@42.674,76.865 P1.2@42.674,78.115 P1.3 P4. P6. P8. P10. P11. P11.6 U2.5 U3.1 U3.3 U3.5 U5.2 U5.3 U5.5 U16.5
copper on no net: | length 6.4
  Top Layer w0.254: 76.962,22.809 77.546,22.809 ; 79.68,35.669 80.569,35.669 ; 83.363,31.09 83.363,31.979 ; 90.602,15.723 90.602,17.755 ; 96.19,15.723 96.19,17.755

## Polygon pours and split planes (outlines as drawn)
no net on Top Layer "12v" (hatched 90Degree grid 0.508 track 0.254, remove dead copper, pour order 8): 80.95,36.297 80.95,17.374 82.474,15.85 85.268,15.85 85.268,21.057 86.03,21.819 86.665,22.454 86.665,24.867 86.665,25.248 85.903,26.01 85.776,26.137 85.776,27.788 85.776,35.027 84.506,36.297
no net on Top Layer "5v" (hatched 90Degree grid 0.508 track 0.254, remove dead copper, pour order 6): 87.808,19.025 89.459,19.025 89.84,19.025 90.602,18.263 90.729,18.136 96.698,18.136 97.46,18.136 98.222,18.898 98.349,19.025 98.349,20.168 99.365,21.184 101.778,21.184 103.048,21.184 103.429,21.565 103.429,23.851 98.222,23.851 97.841,24.232 97.714,24.359 95.682,24.359 94.031,24.359 90.475,20.803 90.348,20.93 87.935,20.93 87.554,20.93 87.173,20.549 87.173,19.279 87.427,19.025
no net on Top Layer "gnd" (solid, remove dead copper, pour order 9): 152.019,54.201 155.58,50.645 212.814,50.645 213.323,51.153 216.63,54.455 216.63,97.889 216.375,98.143 212.051,102.461 211.542,102.461 155.58,102.461 153.036,99.921 151.765,98.651 151.765,98.143
no net on Bottom Layer "gnd" (solid, remove dead copper, pour order 10): 155.182,53.702 158.844,50.082 158.878,50.05 216.181,50.05 219.876,53.702 219.876,97.702 216.181,101.354 158.878,101.354 158.872,101.354 154.989,97.517

## Keep-outs
Keep-Out Layer:
  circle w0.254: c75.946,96.197 r3.5
  circle w0.254: c119.946,96.197 r3.5
  circle w0.254: c119.946,52.197 r3.5
  circle w0.254: c75.946,52.197 r3.5
  lines w0.127: 64.977,71.984 64.977,52.197 68.629,48.545 126.263,48.545 129.915,52.197 129.915,96.197 126.263,99.849 68.629,99.849 64.977,96.197 64.977,88.439 ; 65.002,72.009 73.152,72.009 73.152,78.359 77.216,78.359 77.216,82.144 77.165,82.194 73.152,82.194 73.152,88.392 65.024,88.392 ; 168.142,149.283 168.142,149.283

## Silkscreen, mask and mechanical layers (free items; w line width, h text height)
Top Overlay:
  circle w0.254: c119.946,96.197 r3.5
  circle w0.254: c75.946,96.197 r3.5
  circle w0.254: c75.946,52.197 r3.5
  circle w0.254: c119.946,52.197 r3.5
  rectangle: 95.589,153.162 96.276,156.718
  rectangle: 110.575,153.162 111.262,156.718
  region: 164.543,144.35 164.543,143.662 167.081,143.662 167.081,144.35
  region: 165.03,127.367 165.03,126.68 167.568,126.68 167.568,127.367
  region: 164.719,115.037 164.719,114.35 167.257,114.35 167.257,115.037
  lines w0.203: 50.381,96.05 50.546,96.215 50.546,97.257 51.092,97.803 ; 50.419,94.513 50.927,95.021 50.927,96.037 50.927,96.063 51.689,96.825 ; 114.3,90.551 116.815,93.066 ; 140.677,123.036 141.478,123.837 ; 140.716,124.206 140.97,124.46 ; 140.919,129.743 140.919,129.337 141.478,128.778 ; 162.014,128.562 163.043,127.533 ; 162.179,135.128 162.941,135.89 162.941,137.16 ; 162.382,122.008 162.941,122.567 ; 116.815,93.066 116.815,92.278 116.027,93.066 116.815,93.066
  lines w0.254: 75.946,50.604 75.946,48.884 ; 75.946,97.79 75.946,99.51 ; 119.946,50.604 119.946,48.884 ; 119.946,97.79 119.946,99.51 ; 75.946,48.884 75.496,49.334 76.396,49.334 75.946,48.884 ; 75.946,99.51 76.396,99.06 75.496,99.06 75.946,99.51 ; 119.946,48.884 119.496,49.334 120.396,49.334 119.946,48.884 ; 119.946,99.51 119.496,99.06 120.396,99.06 119.946,99.51
  text "1" at 96.022,157.227 h0.76 r180
  text "1" at 111.008,157.227 h0.76 r180
  text "RTS2" at 114.427,150.749 h1.02 r270
  text "3V3" at 95.504,150.553 h1.02 r270
  text "GND" at 96.835,150.553 h1.02 r270
  text "nc" at 98.044,150.553 h1.02 r270
  text "nc" at 99.314,150.553 h1.02 r270
  text "Rx6" at 100.711,150.553 h1.02 r270
  text "Tx6" at 101.981,150.553 h1.02 r270
  text "HF" at 103.124,150.553 h1.02 r270
  text "3V3" at 110.617,150.553 h1.02 r270
  text "GND" at 111.948,150.553 h1.02 r270
  text "CTS2" at 113.157,150.553 h1.02 r270
  text "Rx2" at 115.824,150.553 h1.02 r270
  text "Tx2" at 117.094,150.553 h1.02 r270
  text "RES" at 118.237,150.553 h1.02 r270
  text "P1" at 163.398,146.812 h1.52
  text "1" at 167.792,143.916 h0.76 r90
  text "11V" at 139.573,143.586 h1.02
  text "P1" at 139.573,142.367 h1.02
  text "P2" at 139.446,141.224 h1.02
  text "GND" at 139.192,140.081 h1.02
  text "A10" at 139.446,135.89 h1.02
  text "A13" at 139.446,134.823 h1.02
  text "P6" at 163.474,132.232 h1.52
  text "11V" at 139.243,130.988 h1.02
  text "3V3" at 139.268,129.87 h1.02
  text "Tx" at 139.446,128.549 h1.02
  text "1" at 168.077,126.934 h0.76 r90
  text "Rx" at 139.395,123.927 h1.02
  text "nc" at 139.497,122.682 h1.02
  text "GND" at 139.268,121.59 h1.02
  text "P10" at 163.703,117.602 h1.52
  text "SDA" at 139.418,115.062 h1.02
  text "1" at 167.766,114.604 h0.76 r90
  text "11V" at 139.757,113.792 h1.02
  text "GND" at 139.372,112.583 h1.02
  text "SCL" at 139.544,111.252 h1.02
  text "I2C3" at 148.59,100.203 h1.27 r90
  text "P&A" at 144.145,99.695 h1.27 r90
  text "UAT1" at 145.923,99.441 h1.27 r90
  text "FotoKiteAdapter" at 70.485,99.06 h1.02 r225
  text "v0.0" at 67.92,98.374 h1.02 r225
  text "Tx1" at 50.851,98.019 h1.02
  text "7" at 76.904,97.79 h0.76
  text "7" at 120.904,97.79 h0.76
  text "PBB" at 41.293,97.536 h1.02
  text "nc" at 49.022,97.384 h1.02
  text "Rx1" at 51.689,97.079 h1.02
  text "IBY" at 41.293,96.266 h1.02
  text "VBY" at 41.293,94.996 h1.02
  text "PBS" at 41.293,93.853 h1.02
  text "nc" at 50.488,92.862 h1.02
  text "GND" at 41.293,92.517 h1.02
  text "flight" at 113.233,92.05 h1.02
  text "nc" at 50.488,91.592 h1.02
  text "GND" at 41.293,91.247 h1.02
  text "direction" at 115.57,90.957 h1.02
  text "GND" at 50.488,90.383 h1.02
  text "PWR" at 41.293,89.916 h1.02
  text "3V3" at 50.488,89.052 h1.02
  text "PWR" at 41.293,88.773 h1.02
  text "august2013" at 57.658,87.63 h1.02 r270
  text "P2" at 50.8,86.741 h1.52
  text "7" at 74.988,50.604 h0.76 r180
  text "7" at 118.988,50.604 h0.76 r180
  text "F3" at 79.299,35.662 h1.52
  text "F2" at 79.172,25.502 h1.52
  text "D3V3" at 125.984,22.86 h1.02
  text "D5V" at 129.286,22.86 h1.02
  text "0" at 83.617,13.31 h1.52 r180
  text "LED" at 83.871,12.421 h1.02
  text "LED" at 86.538,12.421 h1.02
  text "1" at 85.776,12.256 h1.52
  text "2" at 88.443,12.256 h1.52
  text "5V" at 91.364,12.071 h1.27
  text "D11V2" at 190.348,6.096 h1.02
Mechanical 12:
  lines w0.254: 64.977,52.197 68.629,48.545 126.263,48.545 129.915,52.197 129.915,96.197 126.263,99.849 68.629,99.849 64.977,96.197 64.977,52.197